# EAGLE board Tinker cad (EAGLE 9.7.0)

Size 81.8 x 94.8 mm. Coordinates in mm from the lower left corner, seen from the top.
Outline: 0,0 81.8,0 81.8,94.8 0,94.8 0,0
Copper layers (1*16): Top 0.035mm / dielectric 1.5mm / Bottom 0.035mm
Design rules "default": minimum track width 6mil, minimum drill 0.35mm, track to track 6mil, track to pad 6mil, pad to pad 6mil, via to via 6mil, smd to smd 6mil, copper to edge 40mil, drill to drill 6mil, minimum pad ring 10mil, minimum via ring 8mil, stop-mask expansion 4mil, vias tented up to drill 0mil, thermal gap 10mil

## Footprints (pad centres in the part's own frame; a part is rotated, then mirrored left to right if it is on the bottom)
BATTERY-GENERIC = drill 1.118 pad 3.15 octagon: + 2.54,0; - -2.54,0
CAP-THRU-2.54MM = drill 1.016 pad 1.88: 1 -1.27,0; 2 1.27,0
DIODE-AXIAL = drill 1: 1 -5.08,0; 2 5.08,0
MOTOR = drill 1.118 pad 3.15 octagon: + 2.54,0; - -2.54,0
RESAD1016W63L850D250B = drill 0.83 pad 1.43: 1 -5.08,0; 2 5.08,0
HA-06-SM065 = drill 1 pad 1.676: 1 -2.54,-2.54; 2 0,2.54; 3 2.54,-2.54
TO92 = drill 0.813 octagon: 1 -1.27,0; 2 0,1.905; 3 1.27,0
DIP826W53P254L959H508Q8B = drill 0.786 pad 1.386: 1 -4.13,3.81; 2 -4.13,1.27; 3 -4.13,-1.27; 4 -4.13,-3.81; 5 4.13,-3.81; 6 4.13,-1.27; 7 4.13,1.27; 8 4.13,3.81

## Placement (x,y rotation side)
BAT1  9V  [BATTERY-GENERIC]  73.55,45 270 top
C1  10n  [CAP-THRU-2.54MM]  34.65,74.53 0 top
D1  DIODEDIODE-AXIAL  [DIODE-AXIAL]  59.94,36.86 90 top
D2  DIODEDIODE-AXIAL  [DIODE-AXIAL]  47.56,6.33 180 top
D3  DIODEDIODE-AXIAL  [DIODE-AXIAL]  9.01,70.36 180 top
M1  MOTOR_HDR  [MOTOR]  19.19,74.78 0 top
R1  1k  [RESAD1016W63L850D250B]  23.36,14.88 0 top
R2  1k  [RESAD1016W63L850D250B]  26.65,59.85 180 top
RPOT1  50k  [HA-06-SM065]  46.55,87.75 0 top
T1  NPN  [TO92]  18.01,45.22 180 top
U1  LM555_DIP  [DIP826W53P254L959H508Q8B]  34.52,41.41 270 top

## Library data of the parts
BAT1 C1 D1-D3 M1 R1 R2 RPOT1 = Tinkercad
T1 = Tinkercad; CATEGORY: Transistor; SUB-CATEGORY: BJT; TYPE: NPN
U1 = Tinkercad; CATEGORY: IC_Clock-Timing; CURRENT-SUPPLY: 10mA; DESCRIPTION: IC OSC SINGLE TIMER 100KHZ 8-DIP; FREQUENCY: 100kHz; MANUFACTURER: Texas Instruments; MPN: LM555CN/NOPB; OPERATING_TEMP: 0°C to 70°C; PART_STATUS: Active; ROHS_COMPLIANT: ROHS3 Compliant; SUB-CATEGORY: Timer

## Nets
BAT1+: BAT1.+ D3.2 M1.+ U1.4 U1.8
BAT1-: BAT1.- C1.2 M1.- R1.1 T1.3 U1.1
D1_C: D1.2 RPOT1.3
RPOT1_P$1: D2.2 RPOT1.1
T1_B: R2.2 T1.2
T1_C: D3.1 T1.1
U1_DIS: D1.1 D2.1 R1.2 U1.7
U1_OUT: R2.1 U1.3
U1_THR: C1.1 RPOT1.2 U1.2 U1.6

## Tracks (layer width: path | path; a pad name or v marks a point on that pad's centre or on a via)
BAT1+  (4 unrouted)
BAT1-  (5 unrouted)
D1_C  (1 unrouted)
RPOT1_P$1  (1 unrouted)
T1_B  (1 unrouted)
T1_C  (1 unrouted)
U1_DIS  (3 unrouted)
U1_OUT  (1 unrouted)
U1_THR  (3 unrouted)